# EAGLE board schema_3 (EAGLE 9.0.0)
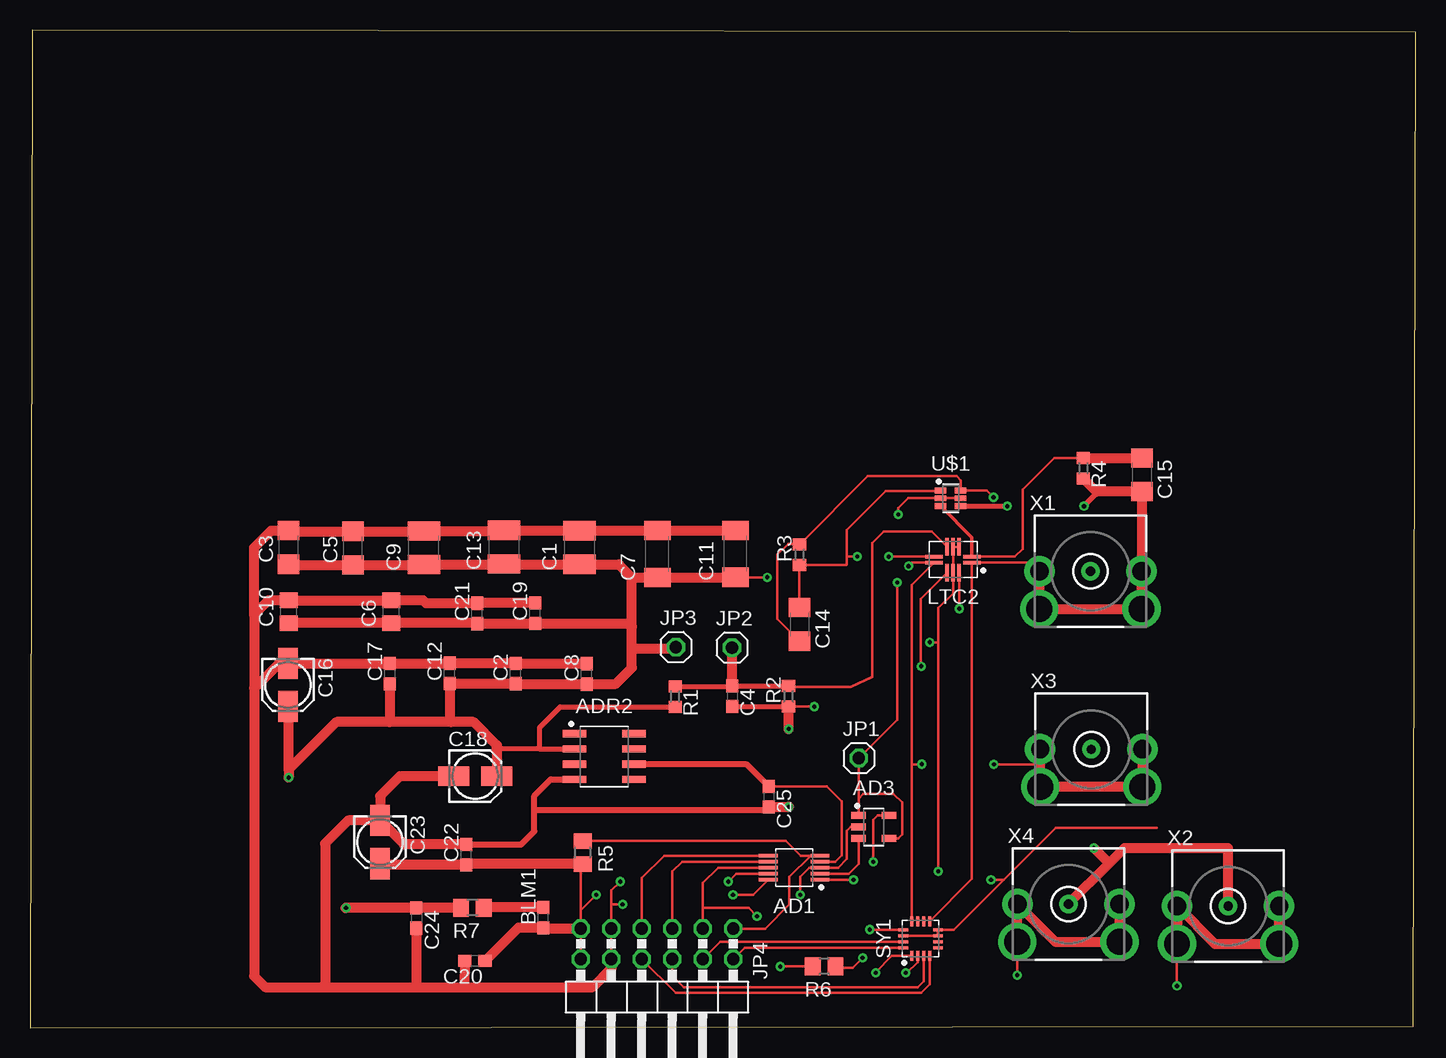
[diagram p0: board, top side]
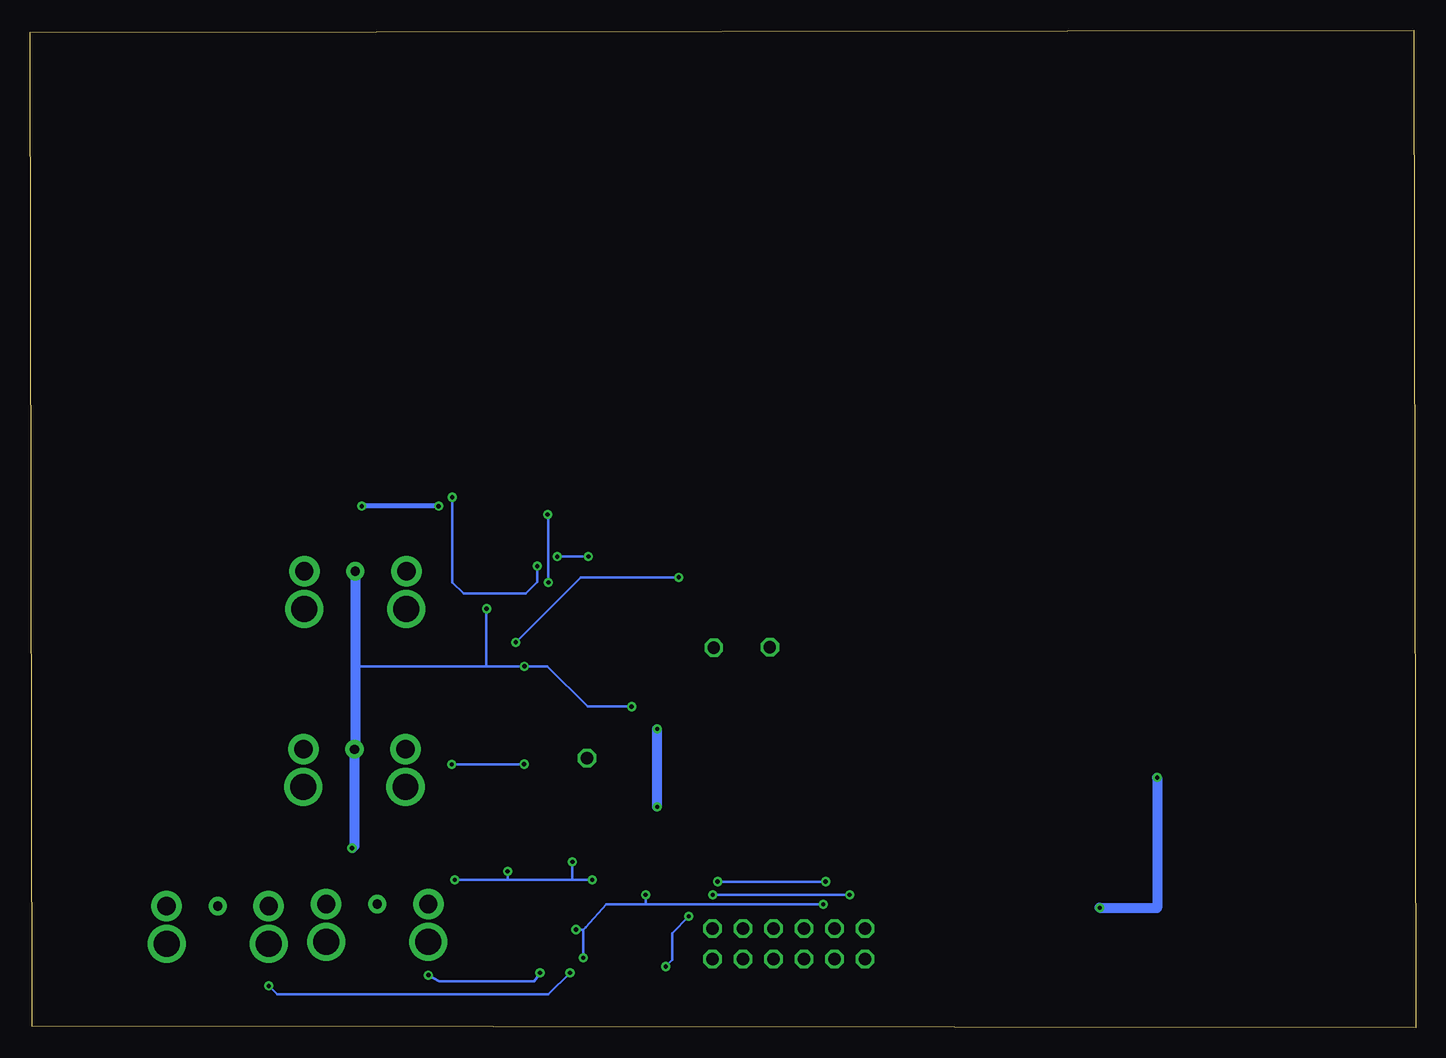
[diagram p1: board, bottom side, seen from below]

Size 115.48 x 83.18 mm. Coordinates in mm from the lower left corner, seen from the top.
Outline: 0,0 115.28,0.11 115.48,82.98 0.18,83.18 0,0
Copper layers (1*16): Top 0.035mm / dielectric 1.5mm / Bottom 0.035mm
Design rules "default": minimum track width 6mil, minimum drill 0.35mm, track to track 6mil, track to pad 6mil, pad to pad 6mil, via to via 6mil, smd to smd 6mil, copper to edge 40mil, drill to drill 6mil, minimum pad ring 10mil, minimum via ring 8mil, stop-mask expansion 4mil, vias tented up to drill 0mil, thermal gap 10mil

## Footprints (pad centres in the part's own frame; a part is rotated, then mirrored left to right if it is on the bottom)
SOP50P490X110-10 = smd 1.55 x 0.297: 1 -2.156,1; 2 -2.156,0.5; 3 -2.156,0; 4 -2.156,-0.5; 5 -2.156,-1; 6 2.156,-1; 7 2.156,-0.5; 8 2.156,0; 9 2.156,0.5; 10 2.156,1
SOT95P280X145-5 = smd 1.186 x 0.597: 1 -1.264,0.95; 2 -1.264,0; 3 -1.264,-0.95; 4 1.264,-0.95; 5 1.264,0.95
SOIC127P600X175-8 = smd 1.968 x 0.599: 1 -2.473,1.905; 2 -2.473,0.635; 3 -2.473,-0.635; 4 -2.473,-1.905; 5 2.473,-1.905; 6 2.473,-0.635; 7 2.473,0.635; 8 2.473,1.905
C1608 = smd 1.1 x 1: 1 -0.85,0; 2 0.85,0
C1210 = smd 1.6 x 2.7: 1 -1.4,0; 2 1.4,0
C0603 = smd 1.1 x 1: 1 -0.85,0; 2 0.85,0
C1206 = smd 1.6 x 1.8: 1 -1.4,0; 2 1.4,0
C0805 = smd 1.3 x 1.5: 1 -0.95,0; 2 0.95,0
C1808 = smd 1.6 x 2.2: 1 -1.95,0; 2 1.95,0
153CLV-0405 = smd 2.6 x 1.6: + 1.8,0; - -1.8,0
1X01 = drill 1.016 octagon: 1 0,0
2X06/90 = drill 1.016 octagon: 1 -6.35,-6.35; 2 -6.35,-3.81; 3 -3.81,-6.35; 4 -3.81,-3.81; 5 -1.27,-6.35; 6 -1.27,-3.81; 7 1.27,-6.35; 8 1.27,-3.81; 9 3.81,-6.35; 10 3.81,-3.81; 11 6.35,-6.35; 12 6.35,-3.81
QFN50P350X250X80-10 = smd 1.459 x 0.27: 1 -1.574,0.25; 2 -1.574,-0.25; 6 1.574,-0.25; 7 1.574,0.25 | smd 0.27 x 1.459: 3 -0.5,-1.074; 4 0,-1.074; 5 0.5,-1.074; 8 0.5,1.074; 9 0,1.074; 10 -0.5,1.074
R0603 = smd 1 x 1.1: 1 -0.85,0; 2 0.85,0
R0805 = smd 1.3 x 1.5: 1 -0.95,0; 2 0.95,0
QFN50P300X300X90-16 = smd 0.81 x 0.25: 1 -1.445,0.75; 2 -1.445,0.25; 3 -1.445,-0.25; 4 -1.445,-0.75; 9 1.445,-0.75; 10 1.445,-0.25; 11 1.445,0.25; 12 1.445,0.75 | smd 0.25 x 0.81: 5 -0.75,-1.445; 6 -0.25,-1.445; 7 0.25,-1.445; 8 0.75,-1.445; 13 0.75,1.445; 14 0.25,1.445; 15 -0.25,1.445; 16 -0.75,1.445
SOTFL65P210X100-6 = smd 0.956 x 0.472: 1 -0.836,0.65; 2 -0.836,0; 3 -0.836,-0.65; 4 0.836,-0.65; 5 0.836,0; 6 0.836,0.65
SMA-142-0701-871 = drill 0.762 pad 1.524: 1 0,0 | drill 1.524 pad 2.54: 2@1 -4.255,0; 2@2 4.255,0 | drill 2.159 pad 2.794: 2@3 -4.255,-3.15; 2@4 4.255,-3.15

## Placement (x,y rotation side)
AD1  0  [SOP50P490X110-10]  63.68,13.34 180 top
AD3  0  [SOT95P280X145-5]  70.31,16.74 0 top
ADR2  ADR441N  [SOIC127P600X175-8]  47.85,22.61 0 top
BLM1  0  [C1608]  42.78,9.18 90 top
C1  10u  [C1210]  45.81,40.03 90 top
C2  0.1u  [C0603]  40.47,29.53 90 top
C3  1000p  [C1206]  21.55,40.04 90 top
C4  0.1u  [C0603]  58.51,27.63 270 top
C5  1000p  [C1206]  26.91,39.99 90 top
C6  100p  [C0805]  30.11,34.67 90 top
C7  0.01u  [C1808]  52.28,39.49 90 top
C8  0.1u  [C0603]  46.39,29.49 90 top
C9  0.47u  [C1210]  32.82,40.01 90 top
C10  100p  [C0805]  21.57,34.69 90 top
C11  0.01u  [C1808]  58.8,39.5 90 top
C12  0.1u  [C0603]  34.97,29.55 90 top
C13  0.47u  [C1210]  39.51,40.07 90 top
C14  10p  [C1206]  64.12,33.62 270 top
C15  10p  [C1206]  92.65,46.1 270 top
C16  10u  [153CLV-0405]  21.49,28.57 270 top
C17  0.1u  [C0603]  30,29.52 90 top
C18  0.1u  [153CLV-0405]  37.1,20.97 0 top
C19  1u  [C0603]  42.09,34.55 90 top
C20  1u  [C0603]  37.07,5.56 180 top
C21  0.1u  [C0603]  37.26,34.53 90 top
C22  0.1u  [C0603]  36.36,14.43 90 top
C23  10u  [153CLV-0405]  29.17,15.48 270 top
C24  1u  [C0603]  32.2,9.15 270 top
C25  0.1u  [C0603]  61.55,19.26 270 top
JP1  0  [1X01]  69.07,22.47 0 top
JP2  0  [1X01]  58.5,31.68 0 top
JP3  0  [1X01]  53.82,31.72 0 top
JP4  0  [2X06/90]  52.25,1.91 180 top
LTC2  0  [QFN50P350X250X80-10]  76.92,39.02 180 top
R1  500  [R0603]  53.77,27.61 270 top
R2  500  [R0603]  63.21,27.63 90 top
R3  500  [R0603]  64.13,39.43 90 top
R4  500  [R0603]  87.78,46.64 270 top
R5  10k  [R0805]  46.05,14.6 270 top
R6  10k  [R0805]  66.18,5.11 180 top
R7  1.5  [R0805]  36.86,10.01 180 top
SY1  SY89873LN  [QFN50P300X300X90-16]  74.22,7.43 90 top
U$1  UM6K34N1  [SOTFL65P210X100-6]  76.72,44.14 0 top
X1  SMA-142-0701-871/880  [SMA-142-0701-871]  88.37,38.05 0 top
X2  SMA-142-0701-871/880  [SMA-142-0701-871]  99.84,10.14 0 top
X3  SMA-142-0701-871/880  [SMA-142-0701-871]  88.44,23.21 0 top
X4  SMA-142-0701-871/880  [SMA-142-0701-871]  86.54,10.31 0 top

## Library data of the parts
AD1 AD3 ADR2 BLM1 LTC2 SY1 U$1 = mylibrary
C1-C3 C5-C13 = rcl
C4 C14 C15 C17-C22 C24 C25 = rcl; SPICEPREFIX: C
C16 C23 R3 R4 = resistor
JP1-JP4 = pinhead
R1 R2 R5-R7 = rcl; SPICEPREFIX: R
X1-X4 = con-coax; MF: JOHNSON COMPONENTS; MPN: 142-0701-871; OC_FARNELL: 1339835; OC_NEWARK: 91B6105

## Nets
0: AD1.3 AD1.9 AD3.2 ADR2.4 C1.2 C2.2 C3.2 C4.2 C5.2 C6.2 C7.2 C8.2 C9.2 C10.2 C11.2 C12.2 C13.2 C16.- C17.2 C18.- C19.2 C20.2 C21.2 C22.2 C23.- C24.2 C25.2 JP4.9 JP4.10 LTC2.8 LTC2.10 R2.1 R6.1 SY1.13 X1.1 X2.1 X3.1 X4.1
3IN+: AD1.2 AD3.3
+3V3: AD1.1 AD3.5 ADR2.2 C1.1 C2.1 C3.1 C5.1 C6.1 C7.1 C8.1 C9.1 C10.1 C11.1 C12.1 C13.1 C16.+ C17.1 C18.+ C19.1 C21.1 C24.1 JP3.1 LTC2.3 LTC2.4 LTC2.9 R1.2 R7.2 SY1.7 SY1.8 SY1.14
CS: AD1.5 JP4.1 R5.1
DIN: AD1.7 JP4.5
DVDD: AD1.10 BLM1.1 C20.1 C22.1 C23.+ JP4.11 JP4.12 R5.2
IN: C14.2 LTC2.7 R3.2 SY1.12 U$1.6 X3.2@1 X3.2@2 X3.2@3 X3.2@4
INN: C15.2 LTC2.1 R4.2 SY1.9 U$1.4 X1.2@1 X1.2@2 X1.2@3 X1.2@4
LDAC: AD1.8 JP4.3 R6.2
LIN+: C15.1 LTC2.2 R4.1 U$1.3
LIN-: C14.1 LTC2.6 R3.1 U$1.1
N$7: BLM1.2 R7.1
QB0: SY1.1 X2.2@1 X2.2@2 X2.2@3 X2.2@4
QB0N: SY1.2 X4.2@1 X4.2@2 X4.2@3 X4.2@4
QB1: JP4.6 SY1.3
QB1N: JP4.8 SY1.4
S0: JP4.2 SY1.16
S1: JP4.4 SY1.15
SCLK: AD1.6 JP4.7
VCTRL: AD3.1 AD3.4 JP1.1 U$1.2 U$1.5
VOCM: C4.1 JP2.1 LTC2.5 R1.1 R2.2
VREF2V5: AD1.4 ADR2.6 C25.1

## Tracks (layer width: path | path; a pad name or v marks a point on that pad's centre or on a via)
0  (via drill 0.35)
  Top 0.2: JP4.9 JP4.10 | v69.98,8.18 SY1.13 | 48.44,10.28 v49.38,10.28 | AD1.3 64.94,13.34 64.18,12.58 v64.18,11.08 | R6.1 67.26,4.98 68.58,4.98 v69.38,5.83 | AD1.3 | AD1.3 67.34,13.34 68.08,14.08 68.08,16.43 68.39,16.74 AD3.2 | LTC2.8 74.23,35.76 74.23,30.13 v74.28,30.13 | LTC2.10 77.43,37.94 v77.43,34.93 | v65.35,26.76 v65.34,26.77 R2.1
  Top 0.203: AD1.9 58.84,12.84 v58.18,12.18 | v49.18,12.18 48.44,11.44 48.44,10.28 JP4.9
  Top 0.406: C4.2 R2.1
  Top 0.508: C22.2 40.93,15.28 42.03,16.38 42.03,18.18 | 42.03,18.18 42.03,19.33 43.41,20.7 ADR2.4 | 42.03,18.18 61.32,18.18 C25.2
  Top 0.813: X2.1 99.83,14.98 91.21,14.98 89.97,13.74 | X4.1 89.97,13.74 | 24.33,3.38 32.18,3.38 | 32.18,3.38 36.18,3.38 | 36.18,3.38 46.88,3.38 48.44,4.94 JP4.10 | C24.2 32.2,3.4 32.18,3.38 | C20.2 36.18,3.38 | C22.2 31.17,15.28 C23.- | C18.- 30.82,20.97 29.17,19.32 C23.- | v88.65,14.97 89.88,13.74 89.97,13.74 | C25.2 63.23,18.41 63.24,18.42 v63.22,18.42 | v63.22,24.91 R2.1 | C23.- 26.51,17.28 24.59,15.36 24.59,3.64 24.33,3.38 | C8.2 46.35,30.38 C2.2 40.45,30.4 C12.2 34.94,30.37 C17.2 C16.- 20.76,30.37 18.68,28.3 | 18.68,28.3 18.68,4.29 19.6,3.38 24.33,3.38 | 18.68,34.44 19.87,35.64 C10.2 21.58,35.62 C6.2 32.77,35.62 33.01,35.38 C21.2 37.29,35.41 C19.2 | 18.68,34.44 18.68,28.3 | 18.68,34.44 18.68,40.02 20.1,41.44 C3.2 21.6,41.39 C5.2 32.8,41.39 C9.2 39.45,41.41 C13.2 45.77,41.47 C1.2 52.27,41.43 C7.2 58.78,41.44 C11.2
  Bottom 0.2: v49.38,10.28 64.18,10.28 | 64.18,10.28 67.48,10.28 69.18,8.38 69.38,8.18 | 69.38,8.18 v69.98,8.18 | v64.18,11.08 64.18,10.28 | 69.38,5.78 v69.38,5.83 69.38,8.18 | 77.48,30.13 v74.28,30.13 72.37,30.13 69.02,26.78 65.4,26.78 65.39,26.8 | 88.33,38.01 X1.1 | v77.43,34.93 77.48,34.88 77.48,30.13 | 88.37,30.15 88.35,30.13 77.48,30.13 | 65.39,26.8 | 65.39,26.8 v65.35,26.76
  Bottom 0.203: v58.18,12.18 v49.18,12.18
  Bottom 0.813: X1.1 88.37,30.15 88.37,23.28 X3.1 88.44,15.14 88.6,14.97 v88.65,14.97 | v63.22,18.42 v63.22,24.91
3IN+
  Top 0.2: AD1.2 68.24,12.84 69.05,13.65 AD3.3
+3V3  (via drill 0.35)
  Top 0.2: SY1.14 SY1.7 SY1.8 76.98,8.18 81.13,12.33 | 81.13,12.33 85.48,16.68 93.88,16.68 | AD1.1 68.32,12.34 68.33,12.33 v68.62,12.33 v68.63,12.33 | v80.08,12.33 81.13,12.33 | AD3.5 70.64,17.69 70.28,17.33 v70.28,13.83 | LTC2.3 LTC2.4 LTC2.9 76.92,36.22 75.68,34.98 75.68,32.06 | 75.68,32.06 v75.68,13.03 | C11.1 61.28,37.55 v61.42,37.55 | v74.99,32.13 75.61,32.13 75.68,32.06
  Top 0.406: R1.2 53.76,26.75 44.18,26.75 42.44,25.01 42.44,23.25 | 42.44,23.25 ADR2.2 | 42.44,23.25 38.99,23.25 38.9,23.16
  Top 0.813: R7.2 C24.1 26.28,9.98 v26.34,10 | 35.08,25.49 36.96,25.49 38.9,23.55 38.9,23.16 C18.+ | 35.08,25.49 29.94,25.49 | 29.94,25.49 25.52,25.49 21.55,21.52 | 21.55,21.52 v21.55,20.85 | 21.55,21.52 21.55,26.72 C16.+ | C17.1 30,25.55 29.94,25.49 | 35.08,25.49 34.97,25.6 C12.1 40.45,28.7 C2.1 46.35,28.68 | 46.35,28.68 C8.1 | 46.35,28.68 48.82,28.68 50.15,30.01 50.15,31.57 | C3.1 21.6,38.59 C5.1 | C5.1 26.98,38.65 | 39.49,38.65 C13.1 | C13.1 39.55,38.63 C1.1 49.06,38.63 50.15,37.54 | 50.15,37.54 C7.1 58.78,37.54 C11.1 | 50.15,31.57 50.15,33.43 | 50.15,33.43 50.15,37.54 | JP3.1 53.67,31.57 50.15,31.57 | 50.15,33.43 49.88,33.71 C19.1 37.29,33.71 C21.1 37.22,33.72 C6.1 21.58,33.72 C10.1 | C5.1 32.8,38.59 C9.1 38.85,38.61 38.87,38.59 39.43,38.59 C13.1
  Bottom 0.2: v68.63,12.33 70.33,12.33 | 70.33,12.33 75.68,12.33 | 75.68,12.33 78.68,12.33 78.78,12.33 v80.08,12.33 | v70.28,13.83 70.28,12.38 70.33,12.33 | v75.68,13.03 75.68,12.33 | v61.42,37.55 69.57,37.55 v74.99,32.13
  Bottom 0.813: v26.34,10 21.55,9.99 v21.55,20.85
CS
  Top 0.2: JP4.1 61.26,8.26 63.28,10.28 | 45.98,15.58 R5.1 46.08,15.58 62.98,15.58 64.22,14.34 AD1.5 65.05,14.34 63.28,12.57
  Top 0.203: 63.28,10.28 63.28,12.57
DIN
  Top 0.203: AD1.7 54.34,13.84 53.52,13.02 JP4.5
DVDD  (via drill 0.35)
  Top 0.2: JP4.11 JP4.12 | 45.9,9.8 45.9,13.5 R5.2
  Top 0.203: AD1.10 60.26,11.08 v58.58,11.08 | v47.18,11.08 45.9,9.8 JP4.11
  Top 0.813: JP4.11 42.85,8.26 BLM1.1 40.69,8.33 C20.1 | R5.2 36.43,13.65 C22.1 29.27,13.58 C23.+
  Bottom 0.203: v58.58,11.08 v47.18,11.08
IN  (via drill 0.35)
  Top 0.2: 73.47,21.97 73.47,36.89 LTC2.7 75.34,38.78 73.52,38.78 v73.21,38.48 | 73.47,21.97 SY1.12 | 73.47,21.97 74.17,21.97 74.22,21.93 74.26,21.93 v74.31,21.97 | v80.33,21.95 84.16,21.95 84.19,21.97 | C14.2 62.29,34.06 62.29,39.44 63.17,40.32 64.1,40.32 R3.2 69.82,45.98 77.21,45.98 77.56,45.64 U$1.6 79.73,44.79 v80.29,44.23 v80.29,44.22
  Top 0.813: X3.2@2 X3.2@4 X3.2@3 84.19,21.97 X3.2@1
  Bottom 0.2: v74.31,21.97 80.23,21.97 80.33,21.88 v80.33,21.95 | v80.29,44.22 80.29,37.12 79.35,36.18 74.18,36.18 73.21,37.15 v73.21,38.48
INN  (via drill 0.35)
  Top 0.2: 78.53,38.73 LTC2.1 | SY1.9 78.49,12.4 LTC2.1 | LTC2.1 83.4,38.77 X1.2@1
  Top 0.406: U$1.4 81.37,43.49 81.38,43.48 v81.43,43.48 | v87.83,43.48 88.87,44.52 88.87,44.7
  Top 0.813: X1.2@1 X1.2@3 X1.2@4 X1.2@2 92.65,38.07 C15.2 88.87,44.7 R4.2
  Bottom 0.406: v81.43,43.48 v87.83,43.48
LDAC  (via drill 0.35)
  Top 0.2: 56.06,9.98 59.88,9.98 v60.58,9.28 | v62.51,5.1 R6.2
  Top 0.203: AD1.8 57.34,13.34 56.06,12.06 56.06,9.98 JP4.3
  Bottom 0.2: v60.58,9.28 61.98,7.88 61.98,5.68 v62.51,5.1
LIN+
  Top 0.2: LTC2.2 82.07,39.27 82.73,39.93 82.73,44.88 85.34,47.49 R4.1
  Top 0.305: U$1.3 78.49,40.88 LTC2.2
  Top 0.813: R4.1 C15.1
LIN-  (via drill 0.35)
  Top 0.2: U$1.1 75.86,44.81 75.8,44.76 71.32,44.76 68.06,41.5 68.06,39.3 | C14.1 R3.1 68.02,38.58 68.06,38.63 68.06,39.3 | LTC2.6 71.8,39.27 71.78,39.24 v71.55,39.27 | v68.95,39.28 68.06,39.3
  Bottom 0.2: v71.55,39.27 69.19,39.27 v68.95,39.28
N$7
  Top 0.813: BLM1.2 37.83,10.03 R7.1
QB0  (via drill 0.35)
  Top 0.2: v95.58,3.48 X2.2@3 | SY1.1 71.83,5.98 70.48,4.63 v70.48,4.58 70.48,4.53
  Top 0.813: X2.2@3 X2.2@1 98.74,6.99 X2.2@4 X2.2@2
  Bottom 0.2: 95.53,3.38 v95.58,3.48 94.87,2.77 72.88,2.77 72.29,2.77 v70.48,4.58
QB0N  (via drill 0.35)
  Top 0.2: SY1.2 73.97,5.47 73.08,4.58 v72.98,4.58 | v82.28,4.38 X4.2@3
  Top 0.813: X4.2@3 X4.2@1 85.44,7.16 X4.2@4 X4.2@2
  Bottom 0.2: v72.98,4.58 73.48,3.88 81.38,3.88 v82.28,4.38
QB1
  Top 0.203: SY1.3 74.47,3.87 73.98,3.38 54.48,3.38 53.52,4.34 JP4.6
QB1N
  Top 0.203: JP4.8 53.8,2.9 74.28,2.9 74.98,3.6 74.98,4.58 74.98,4.88 SY1.4
S0
  Top 0.203: JP4.2 59.56,6.68 SY1.16
S1
  Top 0.203: SY1.15 57.52,7.18 JP4.4
SCLK
  Top 0.203: AD1.6 52.84,14.34 50.98,12.48 JP4.7
VCTRL  (via drill 0.35)
  Top 0.2: AD3.4 72.34,15.79 72.68,16.13 72.68,18.78 71.93,19.48 69.43,19.48 69.05,19.1 | 69.05,19.1 AD3.1 | U$1.5 U$1.2 73.18,44.14 72.35,43.31 v72.35,42.77 | 69.05,19.1 69.05,22.45 JP1.1 72.28,25.68 v72.28,37.11
  Bottom 0.2: v72.28,37.11 72.28,42.7 v72.35,42.77
VOCM
  Top 0.2: 63.26,28.54 R2.2 | LTC2.5 75.13,41.39 71.16,41.35 70.17,40.39 70.17,29.25 68.41,28.41 63.28,28.41 R2.2
  Top 0.406: R1.1 58.49,28.46 C4.1 58.57,28.49 R2.2
  Top 0.813: JP2.1 58.5,28.56 58.57,28.49
VREF2V5
  Top 0.2: AD1.4 67.09,13.84 67.63,14.38 67.63,18.88 66.4,20.11 C25.1
  Top 0.508: ADR2.6 59.69,21.97 C25.1